# Altium PCB Debugger.PcbDoc
Units mm, origin at the board's own origin, x right, y up, seen from the top; angles counter-clockwise.
Board outline 30.1 x 52.58 mm, 2 copper layers (Top Layer, Bottom Layer); 39 components, 27 nets, 139 pads, 35 vias.
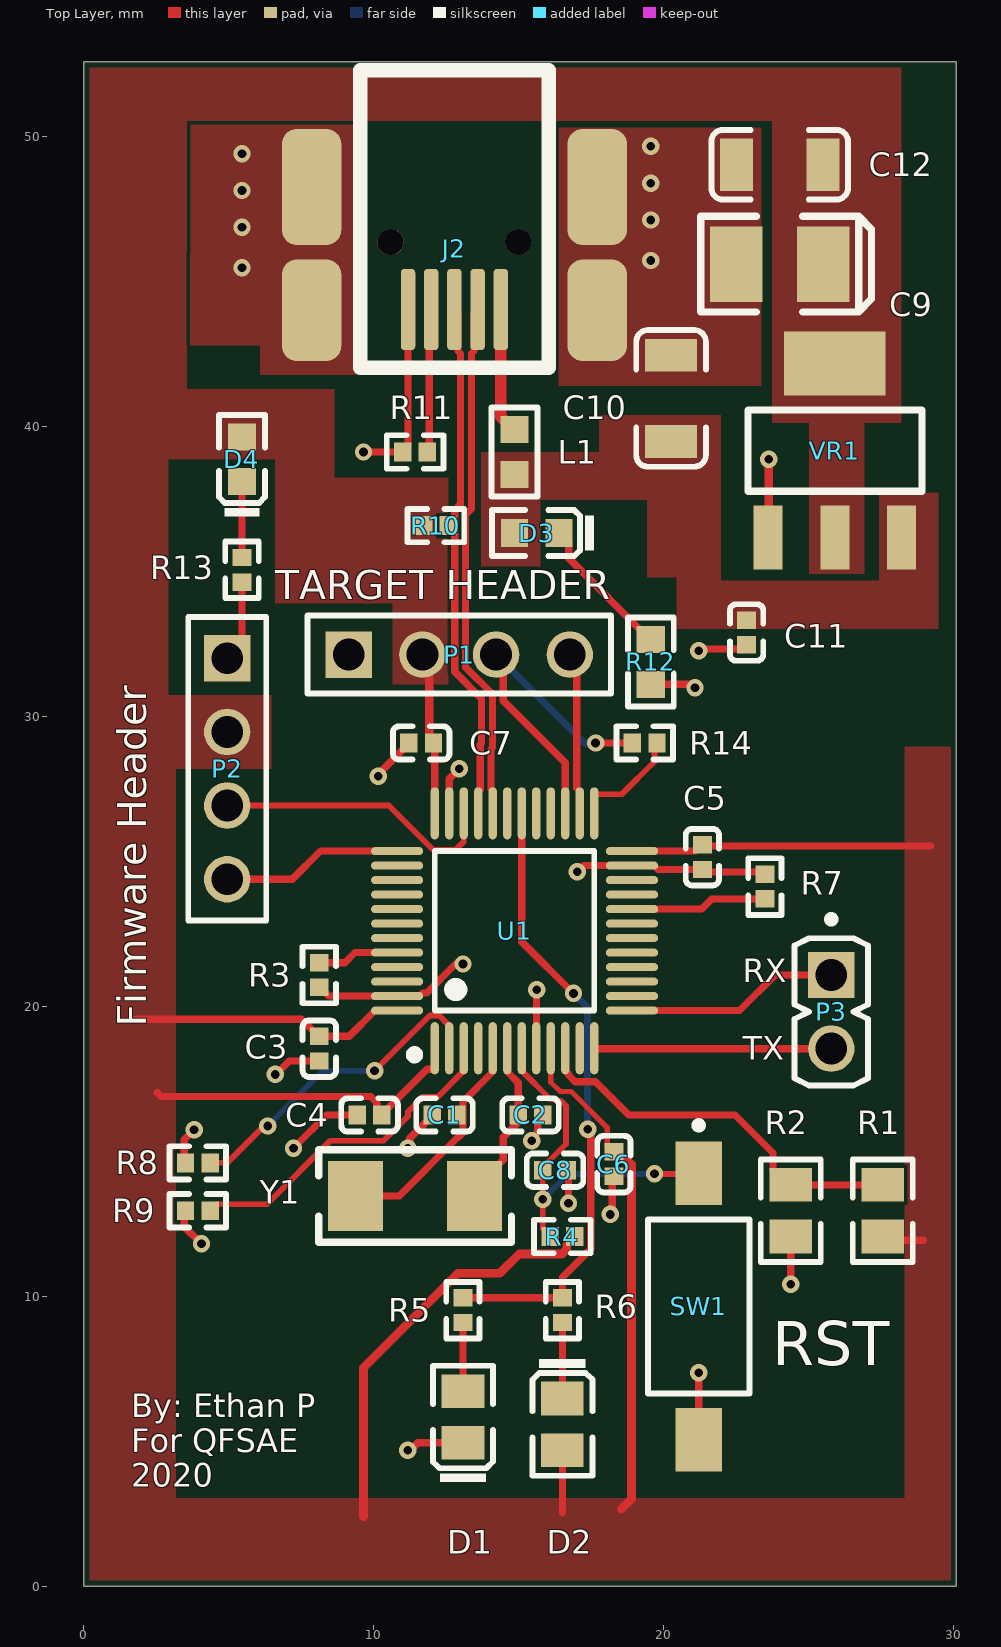
[diagram p0: Top Layer view]
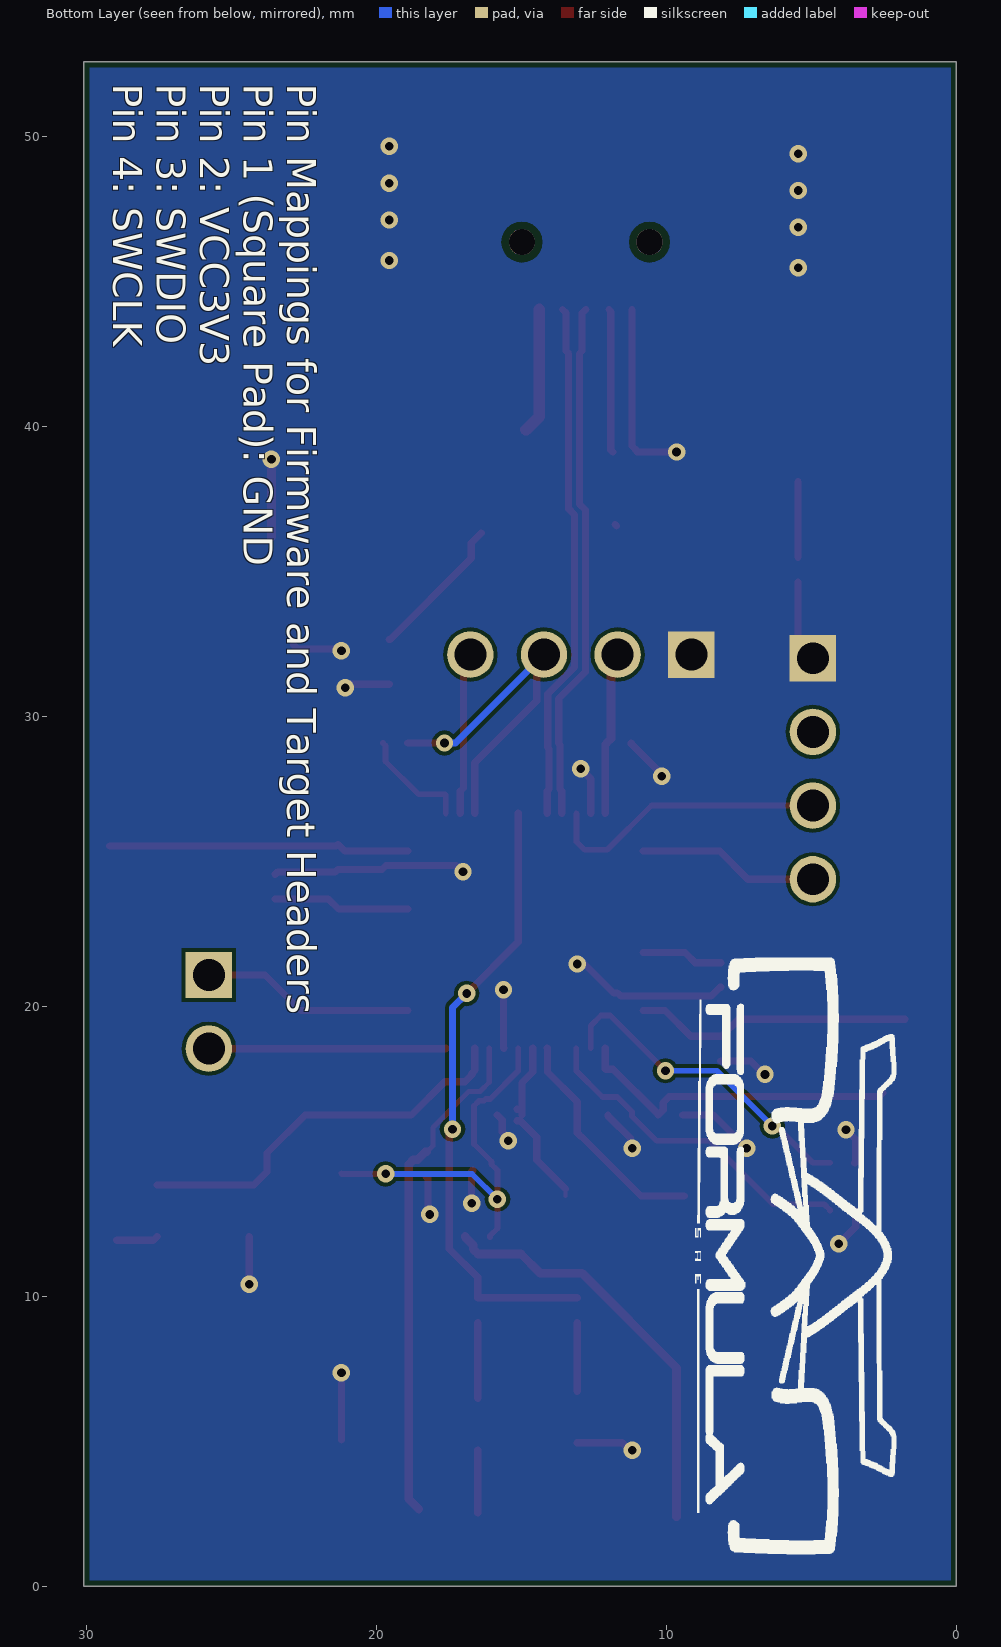
[diagram p1: Bottom Layer view, seen from below]
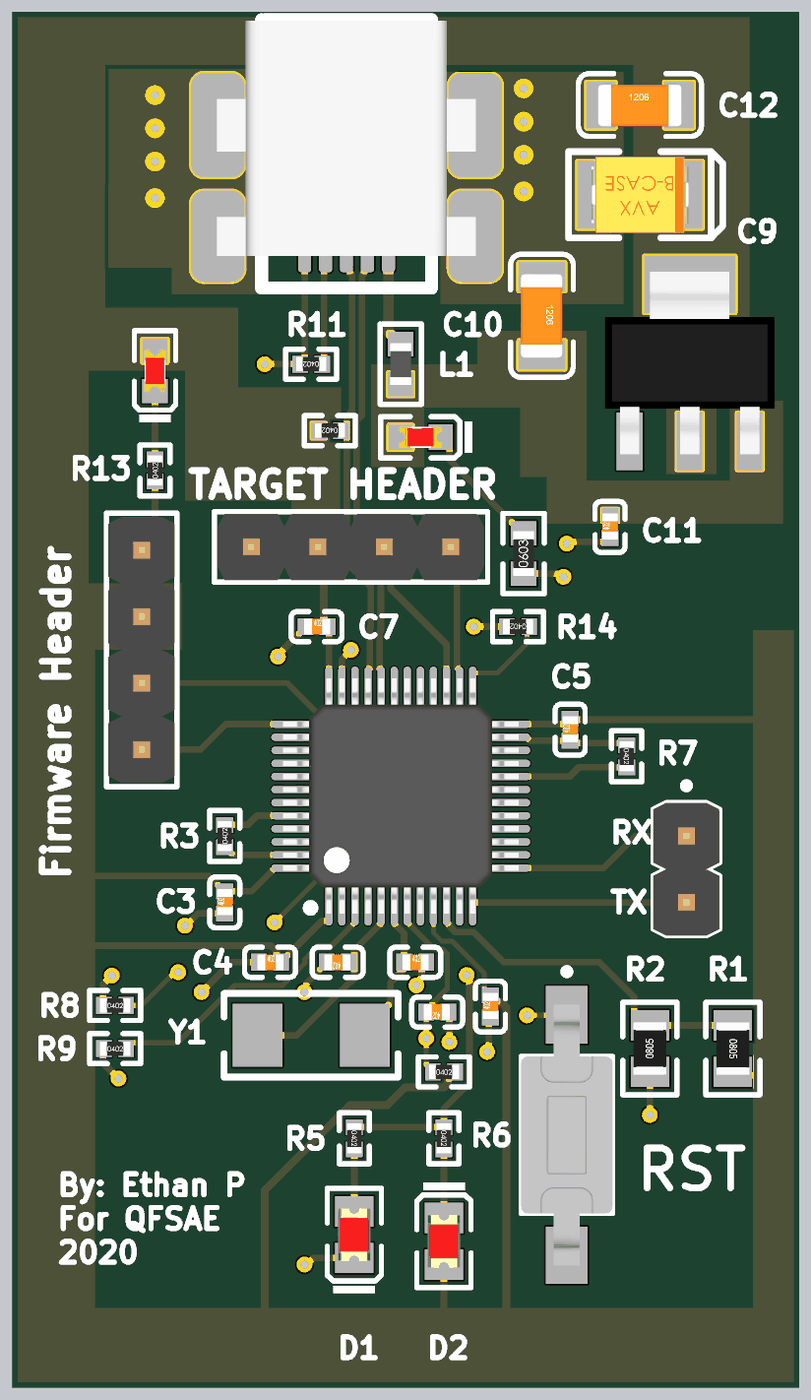
[diagram p2: 3D render of the assembled board from above, using the file's embedded part models]

## Layer stack, top to bottom
Top Solder: solder mask 0.0102, Solder Resist, Dk 3.5
Top Layer: signal copper 0.0356
Dielectric 1: dielectric 0.32, FR-4, Dk 4.8
Bottom Layer: signal copper 0.0356
Bottom Solder: solder mask 0.0102, Solder Resist, Dk 3.5

## Board outline
0,0 30.099,0 30.099,52.578 0,52.578

## Design rules (kind name [scope] priority, off if disabled: settings)
BoardOutlineClearance [All] p1: gap=0.2 ignorepadtopadclearanceinfootprint=FALSE
Clearance [All] p1: gap=0.127 ignorepadtopadclearanceinfootprint=FALSE except(0.25: Arc-Hole Track-Hole SMDPad-Hole THPad-Hole Via-Hole Fill-Hole Poly-Hole Region-Hole Text-Hole)
ComponentClearance [All] p1: gap=0.127 collisioncheckmode=3 verticalgap=0.127 showdistances=TRUE
DiffPairsRouting [All] p1: maxlimit=0.254 minlimit=0.127 mostfreqgap=0.127 toplayer_minwidth=0.127 toplayer_maxwidth=25.4 toplayer_prefwidth=0.127 bottomlayer_minwidth=0.127 bottomlayer_maxwidth=25.4 bottomlayer_prefwidth=0.127 maxuncoupledlength=12.7
Height [All] p1: minheight=0 maxheight=1816.048 prefheight=12.7
HoleSize [All] p1: absolutevalues=TRUE maxlimit=6.3 minlimit=0.3 maxpercent=80.000 minpercent=20.000
HoleToHoleClearance [All] p1: gap=0.25 allowstackedmicrovias=FALSE
MinimumAnnularRing [All] p1: minimumring=0.076
MinimumSolderMaskSliver [All] p1: minsoldermaskwidth=0
PlaneClearance [All] p1: clearance=0.127
PlaneConnect PlaneConnectPowerPads [InPadClass('PowerPads')] p1: planeconnectstyle=Direct reliefexpansion=0.508 reliefentries=4 reliefconductorwidth=0.254 reliefairgap=0.254
PlaneConnect [All] p2: pad.planeconnectstyle=Relief pad.reliefexpansion=0.3 pad.reliefentries=4 pad.reliefconductorwidth=0.127 pad.reliefairgap=0.127 via.planeconnectstyle=Direct via.reliefexpansion=0.3 via.reliefentries=4 via.reliefconductorwidth=0.127 via.reliefairgap=0.127
PolygonConnect PolygonConnectPowerPads [All vs InNet('GND') or InNet('REG_3V3_OUT') or InNet('USB_5V') or InNet('VCC3V3')] p1: connectstyle=Direct reliefconductorwidth=0.254 reliefentries=4 polygonreliefangle="90 Angle" airgapwidth=0.254
PolygonConnect [All] p2: thpad.connectstyle=Relief thpad.reliefconductorwidth=0.127 thpad.reliefentries=4 thpad.polygonreliefangle="90 Angle" thpad.airgapwidth=0.127 smdpad.connectstyle=Relief smdpad.reliefconductorwidth=0.127 smdpad.reliefentries=4 smdpad.polygonreliefangle="90 Angle" smdpad.airgapwidth=0.127 via.connectstyle=Direct via.reliefconductorwidth=0.127 via.reliefentries=4 via.polygonreliefangle="90 Angle" via.airgapwidth=0.127
RoutingVias [All] p1: holewidth=0.3 width=0.6 viastyle="Through Hole" minholewidth=0.3 minwidth=0.6 maxholewidth=0.6 maxwidth=6.6
SilkToSilkClearance [All] p1: silktosilkclearance=0
SilkToSolderMaskClearance [IsPad] p1: minsilkscreentomaskgap=0.127 clearancetoexposedcopper=TRUE
SolderMaskExpansion [All] p1: expansion=0.075 istentingtop=FALSE
Width [All] p1: maxlimit=25.4 minlimit=0.127 preferedwidth=0.127 minimp=50.000000 maximp=50.000000 favimp=50.000000
20 further rules are at their usual default settings.

## Classes and differential pairs
component class POWER: C9 C10 C11 C12 D3 D4 R12 R13 VR1
component class MCU: C1 C2 C3 C4 C5 C6 C7 C8 D1 D2 R1 R2 R3 R4 R5 R6 R7 R8 R9 R14 SW1 U1 Y1
component class CONNECTORS: J2 L1 P1 P2 P3 R10 R11
differential pair USB_D: +USB_D_P -USB_D_N

## Components (designator, comment, footprint, x,y, rotation, side; value= is the part's Value field where it differs from the comment)
C1 "30pF" 0402_C 12.446,16.256 r180 top
C2 "30pF" 0402_C 15.411,16.256 r0 top
C3 "100nF" 0402_C 8.128,18.542 r90 top
C4 "100nF" 0402_C 9.862,16.256 r0 top
C5 "100nF" 0402_C 21.336,25.146 r90 top
C6 "100nF" 0402_C 18.288,14.561 r90 top
C7 "100nF" 0402_C 11.64,29.083 r0 top
C8 "100nF" 0402_C 16.256,14.351 r180 top
C9 "100uF" CASE-B_3528 24.003,45.593 r0 top
C10 "10uF" 1206_C 20.256,40.964 r270 top
C11 "100nF" 0402_C 22.86,32.893 r90 top
C12 "100nF" 1206_C 24.003,49.022 r0 top
D1 "0805 Red" 0805_LED_S1 13.081,5.841 r90 top
D2 "0805 Green" 0805_LED_S1 16.51,5.588 r270 top
D3 "0603 Blue" 0603_LED_S1 15.621,36.322 r180 top
D4 "0603 Blue" 0603_LED_S1 5.461,38.862 r90 top
J2 "67503-1020" MOLX-67503-1020_V 14.386,44.03 r270 top
L1 "BEAD" 0603_L 14.859,39.116 r270 top
P1 "61300411121" 61300411121 12.954,32.131 r0 top
P2 "61300411121" 61300411121 4.953,28.194 r270 top
P3 "613 002 111 21" WE-61300211121_V 25.781,19.812 r270 top
R1 "4.7KΩ ±1%" 0805_R 27.559,12.954 r270 top
R2 "4.7KΩ ±1%" 0805_R 24.384,12.954 r90 top
R3 "100KΩ ±1%" 0402_R 8.128,21.082 r90 top
R4 "100KΩ ±1%" 0402_R 16.51,12.065 r0 top
R5 "200Ω ±1%" 0402_R 13.081,9.525 r270 top
R6 "200Ω ±1%" 0402_R 16.51,9.525 r270 top
R7 "0Ω ±1%" 0402_R 23.495,24.13 r270 top
R8 "10KΩ ±1%" 0402_R 3.937,14.605 r0 top
R9 "10KΩ ±1%" 0402_R 3.937,12.954 r0 top
R10 "1.5KΩ ±1%" 0402_R 12.148,36.576 r180 top
R11 "100KΩ ±1%" 0402_R 11.43,39.116 r180 top
R12 "390Ω ±1%" 0603_R 19.558,31.877 r90 top
R13 "220Ω ±1%" 0402_R 5.461,35.052 r90 top
R14 "100Ω ±1%" 0402_R 19.348,29.083 r180 top
SW1 "FSMSM" TECO-FSMSM-2_V 21.209,9.652 r270 top
U1 "STM32F103CBT6" LQFP-48_7x7x05P 14.859,22.606 r0 top
VR1 "AMS1117-3.3" SOT-223 25.908,39.164 r270 top
Y1 "8MHz ±20ppm 20pF" SMD-5032_2P 11.43,13.462 r180 top

## Footprints (in the part's own frame and the unit in brackets; to place one, negate y for a bottom-side part, rotate by r counter-clockwise, add the part's x,y. Pads: shape width x height; smd on the part's side, far side on the other; paste and mask are expansions set on the pad)
0402_C [mm]
  rect 0.6x0.65 smd mask+0.051: 1(-0.425,0) 2(0.425,0)
  silkscreen extent -0.97,-0.58 0.97,0.58, body extent -0.48,-0.3 0.52,0.3, height 0.2
0402_R [mm]
  rect 0.6x0.65 smd mask+0.051: 1(-0.425,0) 2(0.425,0)
  silkscreen extent -0.97,-0.58 0.97,0.58, body extent -0.57,-0.27 0.58,0.28, height 0.41
0603_L [mm]
  rect 0.93x0.98 smd: 1(-0.77,0) 2(0.77,0)
  silkscreen extent -1.53,-0.79 1.54,0.79, body extent -0.82,-0.41 0.83,0.41, height 0.46
0603_LED_S1 [mm]
  rect 0.93x0.98 smd: A(0.77,0) K(-0.77,0)
  silkscreen extent -1.98,-0.79 1.54,0.79, body extent -0.8,-0.4 0.8,0.4, height 0.6
0603_R [mm]
  rect 0.93x0.98 smd: 1(-0.77,0) 2(0.77,0)
  silkscreen extent -1.53,-0.79 1.54,0.79, body extent -0.85,-0.4 0.85,0.4, height 0.56
0805_LED_S1 [mm]
  rect 1.16x1.47 smd: A(0.89,0) K(-0.89,0)
  silkscreen extent -2.24,-1.04 1.77,1.03, body extent -1.01,-0.62 1.01,0.62, height 1.1
0805_R [mm]
  rect 1.16x1.47 smd: 1(-0.89,0) 2(0.89,0)
  silkscreen extent -1.77,-1.04 1.77,1.03, body extent -1,-0.62 1,0.63, height 0.49
1206_C [mm]
  rect 1.13x1.8 smd: 1(-1.49,0) 2(1.49,0)
  silkscreen extent -2.36,-1.2 2.35,1.2, body extent -1.6,-0.81 1.6,0.79, height 1
61300411121 [mm] "Pin Header, pitch 2.54 mm, THT, Vertical, single row, 4p"
  rect 1.6x1.6 hole 1.1: 1(-3.81,0)
  round 1.6 hole 1.1: 2(-1.27,0) 3(1.27,0) 4(3.81,0)
  silkscreen extent -5.23,-1.35 5.23,1.35, body extent -5.08,-1.27 5.08,1.27, height 8.57
CASE-B_3528 [mm]
  rect 1.8x2.6 smd: 1(1.5,0) 2(-1.5,0)
  silkscreen extent -2.73,-1.65 3.16,1.65, body extent -1.85,-1.47 1.85,1.46, height 2.03
LQFP-48_7x7x05P [mm]
  oval 0.28x1.8 smd mask+0.051: 1(-2.75,-4.05) 2(-2.25,-4.05) 3(-1.75,-4.05) 4(-1.25,-4.05) 5(-0.75,-4.05) 6(-0.25,-4.05) 7(0.25,-4.05) 8(0.75,-4.05) 9(1.25,-4.05) 10(1.75,-4.05) 11(2.25,-4.05) 12(2.75,-4.05) 25(2.75,4.05) 26(2.25,4.05) 27(1.75,4.05) 28(1.25,4.05) 29(0.75,4.05) 30(0.25,4.05) 31(-0.25,4.05) 32(-0.75,4.05) 33(-1.25,4.05) 34(-1.75,4.05) 35(-2.25,4.05) 36(-2.75,4.05)
  oval 1.8x0.28 smd mask+0.051: 13(4.05,-2.75) 14(4.05,-2.25) 15(4.05,-1.75) 16(4.05,-1.25) 17(4.05,-0.75) 18(4.05,-0.25) 19(4.05,0.25) 20(4.05,0.75) 21(4.05,1.25) 22(4.05,1.75) 23(4.05,2.25) 24(4.05,2.75) 37(-4.05,2.75) 38(-4.05,2.25) 39(-4.05,1.75) 40(-4.05,1.25) 41(-4.05,0.75) 42(-4.05,0.25) 43(-4.05,-0.25) 44(-4.05,-0.75) 45(-4.05,-1.25) 46(-4.05,-1.75) 47(-4.05,-2.25) 48(-4.05,-2.75)
  silkscreen extent -3.6,-4.42 2.75,2.75, body extent -4.5,-4.5 4.5,4.5, height 1.6
MOLX-67503-1020_V [mm] "Mini USB Connector, SMT, Righer Angle"
  rrect50% 2.8x0.5 smd: 1(0,0) 2(0,-0.8) 3(0,-1.6) 4(0,-2.4) 5(0,-3.2)
  rrect50% 3.5x2.05 smd: 6(0.025,3.325) 8(0.025,-6.525)
  rrect50% 4x2.05 smd: 7(-4.225,3.325) 9(-4.225,-6.525)
  round 0.9 hole 0.9 unplated: X(-2.325,-3.8) Y(-2.325,0.6)
  silkscreen extent -8.25,-4.85 2,1.65, body extent -8.22,-6.56 0.78,3.34, height 3.95
SMD-5032_2P [mm]
  rect 1.9x2.4 smd: 1(-2.05,0) 2(2.05,0)
  silkscreen extent -3.32,-1.6 3.32,1.6
SOT-223 [mm]
  rect 2.2x1 smd: 1(3,-2.3) 2(3,0) 3(3,2.3)
  rect 2.2x3.5 smd: 2(-3,0)
  silkscreen extent -1.4,-3 1.4,3, body extent -3.49,-3.24 3.49,3.24, height 1.64
TECO-FSMSM-2_V [mm] "SMD, 2-Leads, Body 6x3.5mm, Pitch 9.19mm"
  rect 2.2x1.6 smd: 1(-4.595,0)
  rect 2.18x1.6 smd: 2(4.595,0)
  silkscreen extent -6.37,-1.75 3,1.75, body extent -4.98,-1.75 4.98,1.75, height 4.4
WE-61300211121_V [mm] "Header, 2-Leads, Body 5.08x2.54mm, Pitch 2.54mm"
  rect 1.6x1.6 hole 1.1: 1(-1.27,0)
  round 1.6 hole 1.1: 2(1.27,0)
  silkscreen extent -3.31,-1.27 2.54,1.27, body extent -2.54,-1.27 2.54,1.27, height 8.54

## Part data
C1 C2: library part "0402 30pF (300) 5% 50V", "Chip capacitors", Manufacturer="Guangdong Fenghua Advanced Tech", Package=0402, PartNumber=0402CG300J500NT, SuppliersPartNumber=C1570, Tolerance=5%, Voltage=50V, Capacitance=30pF, ComponentLink1Description="Supplier link", ComponentLink1URL=http://www.szlcsc.com/product/details_1922.html, Supplier=LC
C3 C4 C5 C6 C7 C8 C11: library part "0402 100nF (104) 10% 16V", "Chip capacitors", Manufacturer="Samsung Electro-Mechanics", Package=0402, PartNumber=CL05B104KO5NNNC, SuppliersPartNumber=C1525, Tolerance=10%, Voltage=16V, Capacitance=100nF, ComponentLink1Description="Supplier link", ComponentLink1URL=http://www.szlcsc.com/product/details_1877.html, Supplier=LC
C9: library part "3528 100uF (107) 10% 6.3V", "Tantalum capacitor", Manufacturer=AVX, Package=3528, PartNumber=TAJB107K006RNJ, SuppliersPartNumber=C16133, Tolerance=10%, Voltage=6.3V, Capacitance=100uF, ComponentLink1Description="Supplier link", ComponentLink1URL=http://www.szlcsc.com/product/details_16815.html, Supplier=LC
C10: library part "1206 10uF (106) 10% 50V", "Chip capacitors", Manufacturer="Samsung Electro-Mechanics", Package=1206, PartNumber=CL31A106KBHNNNE, SuppliersPartNumber=C13585, Tolerance=10%, Voltage=50V, Capacitance=10uF, ComponentLink1Description="Supplier link", ComponentLink1URL=http://www.szlcsc.com/product/details_14236.html, Supplier=LC
C12: library part "1206 100nF (104) 10% 50V", "Chip capacitors", Manufacturer="Samsung Electro-Mechanics", Package=1206, PartNumber=CL31B104KBCNNNC, SuppliersPartNumber=C24497, Tolerance=10%, Voltage=50V, Capacitance=100nF, ComponentLink1Description="Supplier link", ComponentLink1URL=http://www.szlcsc.com/product/details_25237.html, Supplier=LC
D1: library part "0805 LED Red", "LED", Color=Red, Package=0805, SuppliersPartNumber=C2295, ComponentLink1Description=供应商链接, ComponentLink1URL=http://www.szlcsc.com/product/details_2668.html, Supplier=LC
D2: library part "0805 LED Green", "LED", Color=Green, Package=0805, SuppliersPartNumber=C2297, ComponentLink1Description=供应商链接, ComponentLink1URL=http://www.szlcsc.com/product/details_2670.html, Supplier=LC
D3 D4: library part "0603 LED Blue", "LED", Color=Blue, Package=0603, SuppliersPartNumber=C72041, ComponentLink1Description=供应商链接, ComponentLink1URL=http://www.szlcsc.com/product/details_73150.html, Supplier=LC
J2: library part CMP-0411-00002-1, "USB, MINI, SMD, RA KME04-USBMU03A01", Manufacturer=Molex, ComponentLink1Description="Manufacturer URL", ComponentLink1URL=http://www.molex.com/, ComponentLink2Description=Datasheet, ComponentLink2URL=http://www.molex.com/pdm_docs/sd/675031020_sd.pdf, DatasheetVersion="Rev F, 06/2009", Mounting Technology="Surface Mount", PackageDescription="Mini USB Connector, SMT, Righer Angle", PackageReference=67503-1020, PartNumber=67503-1020, Terminal Pitch="0.8 mm"
L1: library part "0603 100R@100Mhz 1A", "Ferrite Bead", Package=0603, SuppliersPartNumber=C64181, Supplier=LC
P1 P2: library part CMP-1502-01064-1, "THT Vertical Pin Header WR-PHD, Pitch 2.54 mm, Single Row, 4 pins", Contact Resistance=20mOhm, Manufacturer="Wurth Elektronik", Operating Temperature=-40to105degC, Rated Current=3A, Withstanding Voltage=500VAC, Working Voltage=250VAC, Datasheet URL=https://katalog.we-online.de/em/datasheet/6130xx11121.pdf, Gender=Male, Manufacturer URL=http://www.we-online.de, Mounting Technology=THT, Orientation=Vertical, Package Reference=61300411121, Packaging=Bag, Part Number=61300411121, Pin Number=4, Pitch=2.54mm, Publisher=WurthElektronik, Row Number=Single
P3: library part CMP-1712-00002-3, "Male Header, Pitch 2.54 mm, 1 x 2 Position, Height 8.54 mm, Tail Length 3 mm, -40 to 105 degC, RoHS, Bulk", Max Operating Temperature="125 degC", Min Operating Temperature="-40 degC", ComponentLink1Description="Manufacturer URL", ComponentLink1URL=https://www.we-online.com/, ComponentLink2Description=Datasheet, ComponentLink2URL=http://katalog.we-online.de/em/datasheet/6130xx11121.pdf, DatasheetVersion="Rev. J", Mount="Through Hole", Mounting Technology="Through Hole", PackageDescription="Male Header, Pitch 2.54 mm, 1 x 2 Position, Height 8.54 mm, Tail Length 3 mm", Packaging=Bulk, PartNumber="613 002 111 21", Pins=2, REACH SVHC="No SVHC", RoHSCompliant=True
R1 R2: library part "0805 4.7K (4701) 1%", "Chip resistor", Manufacturer="Uniroyal Elec", Package=0805, Power=1/8W, SuppliersPartNumber=C17673, Tolerance=1%, ComponentLink1Description="Supplier link", ComponentLink1URL=http://www.szlcsc.com/product/details_18361.html, Supplier=LC
R3 R4 R11: library part "0402 100K (1003) 1%", "Chip resistor", Manufacturer="Uniroyal Elec", Package=0402, PartNumber=0402WGF1003TCE, Power=1/16W, Resistance=100KΩ, SuppliersPartNumber=C25741, Tolerance=1%, ComponentLink1Description="Supplier link", ComponentLink1URL=http://www.szlcsc.com/product/details_26484.html, Supplier=LC
R5 R6: library part "0402 200R (2000) 1%", "Chip resistor", Manufacturer="Uniroyal Elec", Package=0402, PartNumber=0402WGF2000TCE, Power=1/16W, Resistance=200Ω, SuppliersPartNumber=C25087, Tolerance=1%, ComponentLink1Description="Supplier link", ComponentLink1URL=http://www.szlcsc.com/product/details_25830.html, Supplier=LC
R7: library part "0402 0R (0R0) 1%", "Chip resistor", Manufacturer="Uniroyal Elec", Package=0402, PartNumber=0402WGF0000TCE, Power=1/16W, Resistance=0Ω, SuppliersPartNumber=C17168, Tolerance=1%, ComponentLink1Description="Supplier link", ComponentLink1URL=http://www.szlcsc.com/product/details_17853.html, Supplier=LC
R8 R9: library part "0402 10K (1002) 1%", "Chip resistor", Manufacturer="Uniroyal Elec", Package=0402, PartNumber=0402WGF1002TCE, Power=1/16W, Resistance=10KΩ, SuppliersPartNumber=C25744, Tolerance=1%, ComponentLink1Description="Supplier link", ComponentLink1URL=http://www.szlcsc.com/product/details_26487.html, Supplier=LC
R10: library part "0402 1.5K (1501) 1%", "Chip resistor", Manufacturer="Uniroyal Elec", Package=0402, PartNumber=0402WGF1501TCE, Power=1/16W, Resistance=1.5KΩ, SuppliersPartNumber=C25867, Tolerance=1%, ComponentLink1Description="Supplier link", ComponentLink1URL=http://www.szlcsc.com/product/details_26610.html, Supplier=LC
R12: library part "0603 390R (3900) 1%", "Chip resistor", Manufacturer="Uniroyal Elec", Package=0603, PartNumber=0603WAF3900T5E, Power=1/10W, Resistance=390Ω, SuppliersPartNumber=C23151, Tolerance=1%, ComponentLink1Description="Supplier link", ComponentLink1URL=http://www.szlcsc.com/product/details_23878.html, Supplier=LC
R13: library part "0402 220R (2200) 1%", "Chip resistor", Manufacturer="Uniroyal Elec", Package=0402, PartNumber=0402WGF2200TCE, Power=1/16W, Resistance=220Ω, SuppliersPartNumber=C25091, Tolerance=1%, ComponentLink1Description="Supplier link", ComponentLink1URL=http://www.szlcsc.com/product/details_25834.html, Supplier=LC
R14: library part "0402 100R (1000) 1%", "Chip resistor", Manufacturer="Uniroyal Elec", Package=0402, PartNumber=0402WGF1000TCE, Power=1/16W, Resistance=100Ω, SuppliersPartNumber=C25076, Tolerance=1%, ComponentLink1Description="Supplier link", ComponentLink1URL=http://www.szlcsc.com/product/details_25819.html, Supplier=LC
SW1: library part CMP-2000-07511-1, "FSMSM Push Button Switch, 50 mA, -35 to 85 degC, 2-Pin SMD, RoHS, Bulk", Case\/Package=SMD/SMT, Contact Current Rating=50mA, Contact Resistance=100mOhm, Manufacturer="TE Connectivity", Max Operating Temperature=85degC, Max Voltage Rating (DC)=12V, Min Operating Temperature=-35degC, Operating Force=180gf, Package Description="2-Pin Surface Mount Device, Body 6 x 3.5 mm, Pitch 9.19 mm", Package Quantity=1000, Voltage Rating (DC)=24V, Actuator Length=1.07mm, Actuator Material=Polyamide, Contact Material=Brass, Contact Plating=Silver, Current Rating=50mA, Datasheet URL=http://www.te.com/commerce/DocumentDelivery/DDEController?Action=showdoc&DocId=Customer+Drawing%7F1437566-3%7FC2%7Fpdf%7FEnglish%7FENG_CD_1437566-3_C2_1437566_3_1_c.dwg.pdf%7F1437566-3, Datasheet Version="Rev. C2, 08/2014", Electrical Life=20000Cycles, ELV=Compliant, Illumination Type=Illuminated, Lead Free=LeadFree, Manufacturer URL=http://www.te.com/, Mechanical Life=20000Cycles, Mount=SurfaceMount, Mounting Technology=SurfaceMount, Orientation=Straight, Package Reference=FSMSM, Packaging=LoosePiece, REACH SVHC=Unknown, RoHSCompliant=true, Switch Travel=0.25mm, Termination=GullWing, Throw Configuration=SPST
U1: "ARM", Package=LQFP-48_7x7x05P, SuppliersPartNumber=C8304, ComponentLink1Description=供应商链接, ComponentLink1URL=http://www.szlcsc.com/product/details_8796.html, Supplier=LC
VR1: library part "SOT-223 AMS1117-3.3", "低压差线性稳压(LDO)", Package=SOT-223, SuppliersPartNumber=C6186, ComponentLink1Description=供应商链接, ComponentLink1URL=http://www.szlcsc.com/product/details_6652.html, Supplier=LC
Y1: library part "SMD-5032_2P 8MHz 20ppm 20pF", "贴片晶振", Package=SMD-5032_2P, SuppliersPartNumber=C115962, ComponentLink1Description=供应商链接, ComponentLink1URL=http://www.szlcsc.com/product/details_117214.html, Supplier=LC

## Via types
v1: diameter 0.6, hole 0.3, Top Layer to Bottom Layer, 35 vias

## Nets (pads, with @x,y where several pads share a name; then routed paths per layer and width w, separated by ;. In a path a pad name is that pad's centre, name@x,y a point inside that pad or via, vN(x,y) a via of type N, cw(c..) or ccw(c..) an arc to the next point about the centre after c; other vN are vias at no path point)
BOOT0: R3.2 U1.44 | length 2.8
  Top Layer w0.25: R3.2 9.01,21.507 9.359,21.856 U1.44
BOOT1: R7.2 U1.20 | length 4.7
  Top Layer w0.25: U1.20 21.312,23.356 21.661,23.705 R7.2
GND: C1.2 C2.2 C3.1 C4.1 C5.1 C6.1 C7.1 C8.1 C9.2 C10.1 C11.1 C12.1 D1.K J2.5 J2.6 J2.7 J2.8 J2.9 P1.1 P2.1 R2.1 R3.1 R7.1 R8.1 R9.1 R11.2 R12.1 R13.1 SW1.2 U1.8 U1.23 U1.35 U1.47 VR1.1 | length 50.8
  Top Layer w0.25: R9.1 3.471,12.913 3.471,12.404 v1(4.064,11.811) ; R8.1 3.471,14.647 3.471,15.409 v1(3.81,15.748) ; P2.1 5.461,32.512 R13.1 ; v1(6.604,17.653) 6.631,17.653 7.095,18.117 C3.1 ; v1(7.239,15.113) 8.382,16.256 C4.1 ; R3.1 8.153,20.657 8.454,20.356 U1.47 11.577,20.356 11.685,20.464 11.828,20.464 12.827,21.463 v1(13.081,21.463) ; v1(9.652,39.116) R11.2 11.005,39.141 11.186,39.322 J2.5 ; v1(10.16,27.94) 10.16,28.003 11.215,29.058 C7.1 ; v1(11.176,4.699) 11.271,4.699 11.523,4.951 D1.K ; v1(11.176,15.113) 11.243,15.18 11.243,15.453 12.021,16.231 C1.2 ; U1.35 12.609,27.849 v1(12.954,28.194) ; v1(15.455,15.367) 15.455,15.462 15.661,15.668 15.661,16.081 C2.2 ; U1.8 15.621,18.568 v1(15.621,20.574) ; C8.1 16.722,14.309 16.722,13.21 v1(16.72,13.208) ; v1(17.018,24.638) 17.242,24.862 19.671,24.862 19.812,24.721 C5.1 21.419,24.638 23.412,24.638 R7.1 ; v1(18.161,12.827) 18.224,12.89 18.224,14.072 C6.1 ; R12.1 20.868,31.107 20.987,30.988 v1(21.082,30.988) ; SW1.2 v1(21.209,7.366) ; v1(21.209,32.258) 21.276,32.325 22.717,32.325 C11.1 ; VR1.1 VR1.1@23.622,36.178 ; v1(24.384,10.414) R2.1
  Top Layer w0.3: VR1.1@23.622,36.178 v1(23.622,38.862)
  other v1: 5.461,45.466 19.558,45.72 5.461,46.863 19.558,47.117 5.461,48.133 19.558,48.387 5.461,49.403 19.558,49.657
NetD1_A: D1.A R5.2 | length 2.4
  Top Layer w0.25: D1.A R5.2
NetD2_K: D2.K R6.2 | length 2.6
  Top Layer w0.25: D2.K R6.2
NetD3_K: D3.K R12.2 | length 5
  Top Layer w0.25: D3.K 16.731,35.982 16.731,35.449 19.533,32.647 R12.2
NetD4_K: D4.K R13.2 | length 2.6
  Top Layer w0.25: R13.2 D4.K
NetJ2_1: J2.1 L1.1 | length 4.4
  Top Layer w0.4: J2.1 14.386,40.334 14.834,39.886 L1.1
NetJ2_4: J2.4 R11.1 | length 5
  Top Layer w0.25: R11.1 11.921,39.182 11.921,43.965 J2.4
NetR1_1: R1.1 R2.2 U1.10 | length 13.8
  Top Layer w0.25: U1.10 16.609,17.788 16.717,17.68 16.717,17.634 16.947,17.404 17.648,17.404 18.796,16.256 22.46,16.256 23.774,14.942 23.774,14.299 24.229,13.844 R2.2 R1.1
NetR8_2: R8.2 U1.2 | length 11.3
  Top Layer w0.2: R8.2 4.953,14.605 6.146,15.798 6.273,15.798 v1(6.35,15.875) ; v1(10.033,17.78) 11.936,19.683 12.261,19.683 12.609,19.335 U1.2
  Bottom Layer w0.2: v1(6.35,15.875) 8.255,17.78 v1(10.033,17.78)
NetR9_2: R9.2 U1.3 | length 11.6
  Top Layer w0.2: R9.2 4.362,12.979 4.562,13.179 6.321,13.179 8.509,15.367 10.344,15.367 11.189,16.212 11.189,16.37 11.697,16.878 12.21,16.878 13.109,17.777 U1.3
OSC_IN: C1.1 U1.5 Y1.2 | length 7.9
  Top Layer w0.25: Y1.2 10.881,13.462 12.913,15.494 12.935,15.494 13.081,15.64 13.081,16.256 13.081,16.714 14.103,17.736 14.103,18.55 U1.5
OSC_OUT: C2.1 U1.6 Y1.1 | length 5.8
  Top Layer w0.127: Y1.1 Y1.1@13.48,13.712
  Top Layer w0.25: Y1.1@13.48,13.712 14.473,14.705 14.473,15.489 15.04,16.056 C2.1@15.148,16.056 ; U1.6 14.615,18.55 14.615,17.736 14.986,17.365 C2.1 ; C2.1@15.132,16.456 C2.1@15.148,16.456
RST: C8.2 R4.1 SW1.1 U1.7 | length 13.5
  Top Layer w0.2: U1.7 15.109,17.777 16.078,16.808 16.235,16.808 16.298,16.745 16.456,16.745 16.637,16.564 16.637,15.253 16.031,14.647 16.031,14.551 C8.2 v1(15.831,13.348) 15.831,12.344 16.085,12.09 R4.1 R4.1@16.085,12.04 ; v1(19.685,14.224) 21.186,14.224 SW1.1
  Bottom Layer w0.2: v1(15.831,13.348) 16.707,14.224 v1(19.685,14.224)
ST_JTCK: P2.4 U1.37 | length 6.3
  Top Layer w0.25: P2.4 7.194,24.384 8.166,25.356 U1.37
ST_JTMS: P2.3 U1.34 | length 9.9
  Top Layer w0.2: P2.3 10.52,26.924 12.044,25.4 12.827,25.4 13.105,25.678 13.105,26.652 U1.34
STLINK_LED: R5.1 R6.1 U1.30 | length 21.7
  Top Layer w0.25: R5.1 R6.1 16.51,10.659 17.487,11.636 17.487,15.66 v1@17.272,15.875 ; U1.30 15.109,22.229 v1(16.891,20.447)
  Bottom Layer w0.25: v1(16.891,20.447) 17.38,19.958 v1(17.38,15.767)
T_JTCK: P1.4 U1.26 | length 5.6
  Top Layer w0.25: P1.4 17.001,31.894 17.001,27.532 17.109,27.424 U1.26
T_JTMS: P1.3 R14.2 U1.27 | length 12.4
  Top Layer w0.25: P1.3 14.474,31.881 14.474,30.537 16.609,28.402 U1.27 ; v1(17.653,29.083) R14.2
  Bottom Layer w0.25: P1.3 17.272,29.083 v1(17.653,29.083)
T_SWDIO_IN: R14.1 U1.25 | length 3.9
  Top Layer w0.2: U1.25 17.609,27.279 17.646,27.316 18.553,27.316 19.685,28.448 19.685,28.995 R14.1
UART_RX: P3.1 U1.13 | length 7.4
  Top Layer w0.25: U1.13 22.62,19.856 23.846,21.082 P3.1
UART_TX: P3.2 U1.12 | length 8.2
  Top Layer w0.25: U1.12@17.609,18.556 17.623,18.542 P3.2
USB_5V: C10.2 C11.2 D3.A L1.2 VR1.3
USB_D_N: J2.2 U1.32 | length 18
  Top Layer w0.25: J2.2 13.461,43.905 13.461,42.598 13.375,42.511 13.375,37.159 13.172,36.956 13.172,31.695 14.097,30.77 14.097,28.923 14.052,28.878 14.052,27.481 14.109,27.424 U1.32
USB_D_P: J2.3 R10.1 U1.33 | length 18
  Top Layer w0.25: J2.3 12.911,43.905 12.911,42.598 12.998,42.511 12.998,37.315 12.795,37.113 12.795,36.576 12.795,31.539 13.716,30.618 13.716,29.075 13.675,29.034 13.675,27.49 13.609,27.424 U1.33
VCC3V3: C3.2 C4.2 C5.2 C6.2 C7.2 C9.1 C12.2 D2.A D4.A P1.2 P2.2 R1.2 R4.2 R10.2 U1.1 U1.9 U1.24 U1.36 U1.48 VR1.2 | length 72.7
  Top Layer w0.18: U1.9 16.109,17.386 16.433,17.062 16.816,17.062 18.053,15.825 18.053,15.196 C6.2@18.263,14.986
  Top Layer w0.25: 1.778,19.558 7.512,19.558 8.103,18.967 C3.2 9.16,18.967 10.049,19.856 U1.48 ; 2.54,17.018 2.667,16.891 9.906,16.891 10.112,16.685 10.112,16.431 C4.2 10.287,16.281 11.841,17.835 12.095,17.835 12.109,17.849 U1.1 ; R10.2 R10.2@11.767,36.62 ; C7.2 12.109,29.039 U1.36 ; 16.51,2.54 D2.A ; U1.24 21.096,25.356 21.311,25.571 C5.2 21.38,25.527 29.21,25.527 ; R1.2 27.685,11.938 28.956,11.938
  Top Layer w0.3: 9.652,2.413 9.652,7.538 12.909,10.795 14.351,10.795 15.019,11.463 16.5,11.463 16.662,11.625 16.662,11.767 16.935,12.04 R4.2 ; P1.2 11.915,31.9 11.915,29.233 C7.2 ; C6.2@18.263,14.986 C6.2 18.313,14.986 18.586,14.713 18.728,14.713 18.89,14.551 18.89,3.015 18.542,2.667
pads on no net: J2.X J2.Y U1.4 U1.11 U1.14 U1.15 U1.16 U1.17 U1.18 U1.19 U1.21 U1.22 U1.28 U1.29 U1.31 U1.38 U1.39 U1.40 U1.41 U1.42 U1.43 U1.45 U1.46

## Polygon pours and split planes (outlines as drawn)
GND on Bottom Layer "GND_L02_P000" (solid, pour order 0): -2.032,56.134 -2.032,54.229 -2.032,-15.875 41.021,-15.875 41.021,-15.367 41.021,56.134
VCC3V3 on Top Layer "Top Layer-VCC3V3" (solid, pour order 24): 3.175,-1.397 32.131,-1.397 32.131,3.048 31.496,3.048 31.496,28.956 28.321,28.956 28.321,3.048 3.175,3.048 3.175,28.194 6.477,28.194 6.477,30.734 2.921,30.734 2.921,38.862 6.604,38.862 6.604,33.909 10.668,33.909 10.668,31.115 12.573,31.115 12.573,38.227 8.636,38.227 8.636,41.275 3.556,41.275 3.556,50.546 23.749,50.546 23.749,40.132 25.019,40.132 25.019,34.925 26.924,34.925 26.924,40.132 28.194,40.132 28.194,53.34 24.257,53.34 -0.889,53.34 -0.889,50.546 -0.381,50.546 -0.381,39.878 -1.143,39.878 -1.143,-1.651 3.175,-1.651
GND on Top Layer "Top Layer-GND" (solid, pour order 14): 6.096,41.783 9.398,41.783 9.398,50.419 3.683,50.419 3.683,45.974 3.683,42.799 6.096,42.799
USB_5V on Top Layer "Top Layer-USB_5V" (solid, pour order 9): 19.431,34.798 20.447,34.798 20.447,33.02 29.464,33.02 29.464,37.719 27.432,37.719 27.432,34.671 21.971,34.671 21.971,40.386 17.78,40.386 17.78,39.116 13.716,39.116 13.716,35.179 15.748,35.179 15.748,37.465 19.431,37.465
no net on Top Layer "NONET_L01_P003" (solid, pour order 3): 30.861,38.227
GND on Top Layer "GND_L01_P002" (solid, pour order 2): 16.383,50.292 16.383,41.402 23.368,41.402 23.368,50.292

## Silkscreen, mask and mechanical layers (free items; w line width, h text height)
Top Overlay:
  text "TARGET HEADER" at 6.604,34.036 h1
  text "RX" at 22.733,20.828 h0.8
  text "Firmware Header" at 2.159,19.304 h1 r90
  text "TX" at 22.733,18.161 h0.8
  text "RST" at 23.749,7.62 h1.52
  text "By: Ethan P / For QFSAE / 2020" at 1.651,3.429 h0.8
Bottom Overlay:
  drawing of 13 lines, arcs and shapes, not listed
  text "Pin Mappings for Firmware and Target Headers / Pin 1 (Square Pad): GND / Pin 2: VCC3V3 / Pin 3: SWDIO / Pin 4: SWCLK" at 29.083,51.816 h1 r90
Mechanical 1:
  the board outline again, w0.1